# Altium PCB PSoC Devboard CAN Cape.PcbDoc
Units mil, origin at the board's own origin, x right, y up, seen from the top; angles counter-clockwise.
Board outline 1080 x 3125 mil, 2 copper layers (Top Layer, Bottom Layer); 15 components, 17 nets, 118 pads, 11 vias.
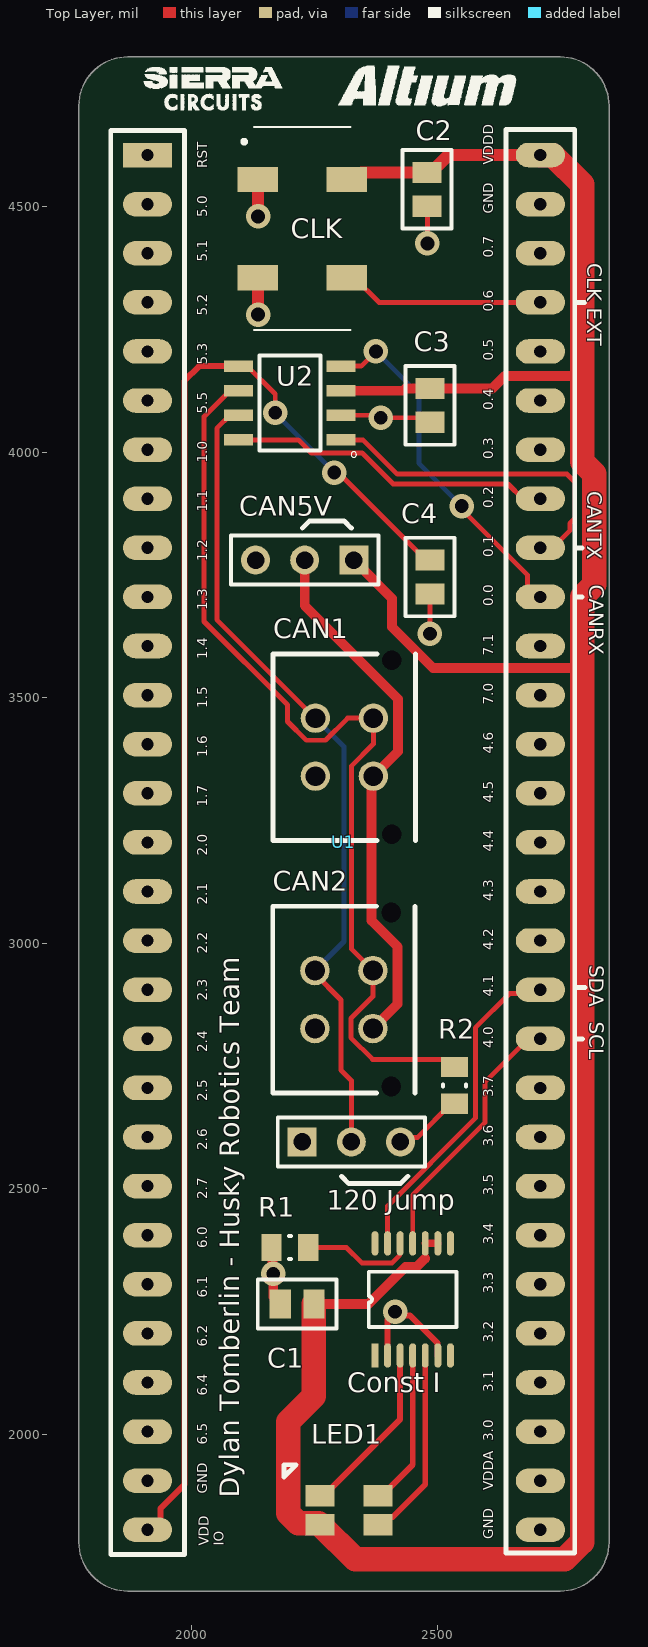
[diagram p0: Top Layer view]
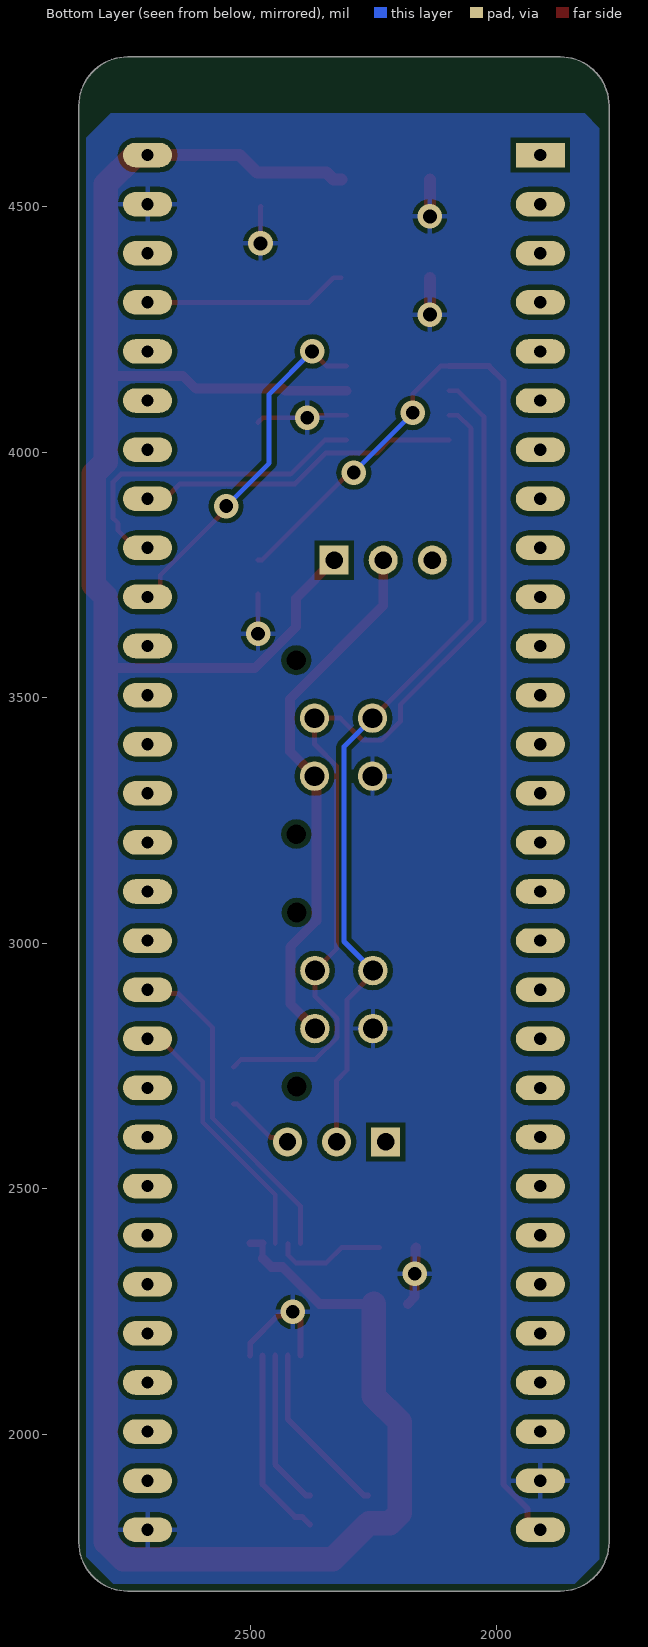
[diagram p1: Bottom Layer view, seen from below]

## Layer stack, top to bottom
Top Solder: solder mask 0.4, Solder Resist, Dk 3.5
Top Layer: signal copper 1.4
Dielectric 1: dielectric 12.6, FR-4, Dk 4.8
Bottom Layer: signal copper 1.4
Bottom Solder: solder mask 0.4, Solder Resist, Dk 3.5

## Board outline
1770,4705 cw(c1870,4705) 1870,4805 2750,4805 cw(c2750,4705) 2850,4705 2850,1780 cw(c2750,1780) 2750,1680 1870,1680 cw(c1870,1780) 1770,1780

## Design rules (kind name [scope] priority, off if disabled: settings)
Clearance [All] p1: gap=10 ignorepadtopadclearanceinfootprint=FALSE except(0: Arc-Hole Track-Hole SMDPad-Hole THPad-Hole Via-Hole Fill-Hole Poly-Hole Region-Hole Text-Hole)
PolygonConnect [All] p1: connectstyle=Relief reliefconductorwidth=10 reliefentries=4 polygonreliefangle="90 Angle" airgapwidth=10
RoutingVias [All] p1: holewidth=28 width=50 viastyle="Through Hole" minholewidth=28 minwidth=50 maxholewidth=28 maxwidth=50
SolderMaskExpansion [All] p1: expansion=4 istentingtop=FALSE
Width [All] p1: maxlimit=100 minlimit=8 preferedwidth=10 minimp=50.000000 maximp=50.000000 favimp=50.000000
30 further rules are at their usual default settings.

## Classes and differential pairs
component class U_RGB_LEDs: C1 "Const I" LED1 R1 u3
component class "PSoC Devboard CAN Cape": "120 Jump" C2 C3 C4 CAN1 CAN2 CAN5V CLK R2 U1 U2

## Components (designator, comment, footprint, x,y, rotation, side; value= is the part's Value field where it differs from the comment)
"120 Jump" "Header 3" HDR1X3 2225,2595 r0 top (schematic designator CAN_Jumper)
C1 "1uF" 0805 2214.45,2265 r180 top
C2 ".1uF" 0805 2479.29,4535 r90 top
C3 ".1uF" 0805 2485,4095 r270 top
C4 ".1uF" 0805 2485,3745.55 r270 top
CAN1 "Molex Micro" 0430450427 2310.94,3399.06 r90 top
CAN2 "Molex Micro" 0430450427 2310,2885 r90 top
CAN5V "Header 3" HDR1X3 2330,3780 r180 top
CLK "SG-636PCW_50.0000MC3__ROHS" SG-636 2225,4455 r270 top
"Const I" "ConstantCurrentDriver" NCP5623 2373.23,2160 r90 top (schematic designator CurrentDriver1)
LED1 "RGB_LED" ASMB-MTB1-0A3A2 2320,1845 r270 top
R1 "71R5K 1% 0805(2012)" RESC0805(2012)_N 2200,2380 r180 top value="120.00 Ohm"
R2 "120" RESC0805(2012)_N 2535,2710 r270 top value="120.00 Ohm"
U1 "Component_1" CY8CKIT-043 1910,4605 r0 top locked
U2 "MCP2562-E/SN" SOIC127P600X175-8N 2200,4100 r180 top

## Footprints (in the part's own frame and the unit in brackets; to place one, negate y for a bottom-side part, rotate by r counter-clockwise, add the part's x,y. Pads: shape width x height; smd on the part's side, far side on the other; paste and mask are expansions set on the pad)
0805 [mm]
  rect 1.1x1.5 smd: 1(-0.875,0) 2(0.875,0)
  silkscreen extent -2.03,-1.27 2.03,1.27
0430450427 [mil] "Molex micro-fit 3.0 4 pos"
  round 60 hole 40: 1(-59.06,59.06) 2(-59.06,-59.06) 3(59.06,59.06) 4(59.06,-59.06)
  round 0 hole 40 unplated: 7(177.17,-96.06) ""(-177.17,-96.06)
  silkscreen extent -190,-145 190,145
ASMB-MTB1-0A3A2 [mm]
  rect 1.1x1.5 / inner rect 0x0 / far side rect 0x0 all layers, no hole: 1(-0.75,-1.5)
  rect 1.1x1.5 / inner rect 1.1x1.5 / far side rect 0x0 all layers, no hole: 2(-0.75,1.5) 3(0.75,1.5) 4(0.75,-1.5)
  silkscreen extent -2.35,-3.37 -1.71,-2.73
CY8CKIT-043 [mil] "Breakout pins to make capes for this devboard"
  rect 100x50 hole 25: 1(0,0)
  oval 100x50 hole 25: 2(0,-100) 3(0,-200) 4(0,-300) 5(0,-400) 6(0,-500) 7(0,-600) 8(0,-700) 9(0,-800) 10(0,-900) 11(0,-1000) 12(0,-1100) 13(0,-1200) 14(0,-1300) 15(0,-1400) 16(0,-1500) 17(0,-1600) 18(0,-1700) 19(0,-1800) 20(0,-1900) 21(0,-2000) 22(0,-2100) 23(0,-2200) 24(0,-2300) 25(0,-2400) 26(0,-2500) 27(0,-2600) 28(0,-2700) 29(0,-2800) 30(800,-2800) 31(800,-2700) 32(800,-2600) 33(800,-2500) 34(800,-2400) 35(800,-2300) 36(800,-2200) 37(800,-2100) 38(800,-2000) 39(800,-1900) 40(800,-1800) 41(800,-1700) 42(800,-1600) 43(800,-1500) 44(800,-1400) 45(800,-1300) 46(800,-1200) 47(800,-1100) 48(800,-1000) 49(800,-900) 50(800,-800) 51(800,-700) 52(800,-600) 53(800,-500) 54(800,-400) 55(800,-300) 56(800,-200) 57(800,-100) 58(800,0)
  silkscreen extent -75,-2850 870,52
HDR1X3 [mm] "Connector; Header; 3 Position"
  rect 1.5x1.5 hole 0.9: 1(0,0)
  round 1.5 hole 0.9: 2(2.54,0) 3(5.08,0)
  silkscreen extent -1.27,-1.27 6.35,1.27
NCP5623 [mm] "Constant current driver for RGB LEDs (50mA)"
  rect 1.26x0.36 smd: 1(0,0)
  oval 1.26x0.36 smd: 2(0,-0.65) 3(0,-1.3) 4(0,-1.95) 5(0,-2.6) 6(0,-3.25) 7(0,-3.9) 8(5.8,-3.9) 9(5.8,-3.25) 10(5.8,-2.6) 11(5.8,-1.95) 12(5.8,-1.3) 13(5.8,-0.65) 14(5.8,0)
  silkscreen extent 1.46,-4.23 4.34,0.33
RESC0805(2012)_N [mm] "Chip Resistor, Body 2.0x1.3mm, IPC Medium Density"
  rect 1.05x1.4 smd: 1(-0.95,0) 2(0.95,0)
  silkscreen extent -0.05,-0.6 0.05,0.6, body extent -1.1,-0.67 1.1,0.68, height 0.7
SG-636 [mm]
  rect 1.3x2.1 smd: 1(-2.54,-2.3) 2(2.54,-2.3) 3(2.54,2.3) 4(-2.54,2.3)
  silkscreen extent -5.25,-3.1 5.25,2.5
SOIC127P600X175-8N [mm]
  rect 1.5x0.6 smd: 1(-2.65,1.905) 2(-2.65,0.635) 3(-2.65,-0.635) 4(-2.65,-1.905) 5(2.65,-1.905) 6(2.65,-0.635) 7(2.65,0.635) 8(2.65,1.905)
  silkscreen extent -3.44,-2.45 1.58,2.81

## Part data
"120 Jump" CAN5V: "Header, 3-Pin", LatestRevisionDate=17-Jul-2002, LatestRevisionNote="Re-released for DXP Platform.", Publisher="Altium Limited"
C1 C2 C3 C4: library part Cap
CAN1 CAN2: library part "Molex micro-fit 4-pin (dual row schematic)", "Molex micro-fit 3.0, P/N 0430450427"
CLK: library part SG-636, "Standard Clock Oscillators 50MHz 3.3Volt 100ppm -20C +70C", Arrow Part Number="SG-636PCW 50.0000MC3: ROHS", Manufacturer_Name="Epson Timing", Datasheet Link=http://www.mouser.com/ds/2/137/G-636PCE_en-1003252.pdf, Manufacturer_Part_Number="SG-636PCW 50.0000MC3: ROHS"
R1 R2: library part "120R 5% 0805", "120R 0.125W 5% 0805 (2012 Metric)  SMD", Case-EIA=0805, Case-Metric=2012, Power="0.125 W", Tolerance="5 %", Technology=SMT
U2: "Microchip MCP2562-E/SN, CAN Transceiver 1MBps 1-channel IEC 61000-4-2, 8-Pin SOIC", Package="SO-8 Microchip", Availability=Unavailable, MF=Microchip, MP=MCP2562-E/SN, Price=None, SnapEDA_Link=https://www.snapeda.com/parts/MCP2562-E/SN/Microchip/view-part/?ref=snap

## Via types
v1: diameter 50, hole 28, Top Layer to Bottom Layer, 11 vias

## Nets (pads, with @x,y where several pads share a name; then routed paths per layer and width w, separated by ;. In a path a pad name is that pad's centre, name@x,y a point inside that pad or via, vN(x,y) a via of type N, cw(c..) or ccw(c..) an arc to the next point about the centre after c; other vN are vias at no path point)
+5: "Const I.9" "Const I.10" C1.1 C2.2 C3.1 CAN5V.1 CLK.4 LED1.4 U1.58 U2.3 | length 5828
  Top Layer w10: 2450.55,4125 2455,4129.45
  Top Layer w12: 2475.59,2357.31 2475.59,2388.35
  Top Layer w15: 2475.59,2388.35 2501.18,2388.35
  Top Layer w20: C1.1 2360,2265 2435,2340 2457.68,2340 2474.98,2357.31 2475.59,2357.31 ; U2.3 2430.55,4125 ; CAN5V.1 2407.94,3702.06 2407.94,3643.42 2491.36,3560 2790,3560 2795,3565 ; 2435,4129.45 2455,4129.45 C3.1 2611.99,4129.45 2637.54,4155 2795,4155
  Top Layer w25: CLK.4 2331.3,4555 2345.75,4569.45 C2.2 2487.16,4569.45 2522.71,4605 U1.58
  Top Layer w50: C1.1 2248.9,2077.34 2196.42,2024.86 2196.42,1838.38 2216.92,1817.87 2258.54,1817.87 LED1.4 2262.13,1815.47 2332.6,1745 2759.85,1745 2795,1780.15 2795,3565 2795,3705 2820,3730 2820,3955.71 2795,3980.71 2795,4155 2795,4545 2735,4605 U1.58
GND: "Const I.2" "Const I.6" C1.2 C2.1 C3.2 C4.2 CAN1.1 CAN2.1 CLK.1 CLK.2 R1.2 U1.28 U1.30 U1.57 U2.2 | length 850
  Top Layer w10: CLK.2 CLK.2@2135,4354.45 ; CLK.1 CLK.1@2135,4554.45 ; U2.2 2380,4075 v1(2385,4070) 2475.55,4070 C3.2 ; C2.1 2480,4499.84 v1(2480,4425) ; v1(2485,3630) C4.2
  Top Layer w12: 2398.82,2160 2398.82,2233.68 v1(2414.11,2248.97) 2421.38,2241.7 2444.26,2241.7 2500.77,2185.19 2500.77,2160.42 2501.18,2160
  Top Layer w20: R1.2 2164.32,2378.28 2164.32,2328.41 v1(2166.04,2326.69) 2166.04,2278.96 C1.2
  Top Layer w25: v1(2135,4280) CLK.2@2135,4354.45 ; v1(2135,4480) CLK.1@2135,4554.45
NetCAN1_2: CAN1.2 CAN2.2 CAN5V.2 | length 1097.8
  Top Layer w20: CAN5V.2 2230,3687.22 2420,3497.22 2420,3390 CAN1.2 2366.06,3336.06 2366.06,3045.6 2419.06,2992.6 2419.06,2875.94 CAN2.2
NetCAN1_3: "120 Jump.2" CAN1.3 CAN2.3 U2.7 | length 1671.2
  Top Layer w10: U2.7 2077.95,4075 2051.14,4048.19 2051.14,3658.86 CAN1.3 ; CAN2.3 2250.94,2937.17 2304.06,2884.06 2304.06,2741.04 2325,2720.1 2325,2595
  Bottom Layer w10: CAN2.3 2310,3003.11 2310,3400 CAN1.3
NetCAN1_4: CAN1.4 CAN2.4 R2.1 U2.6 | length 1935.3
  Top Layer w10: U2.6 2077.95,4125 2025,4072.05 2025,3655 2195,3485 2195,3451.36 2233.25,3413.11 2272.36,3413.11 2317.36,3458.11 CAN1.4 2370,3405.47 2325,3360.47 2325,2988.11 CAN2.4 2369.06,2891.42 2324.06,2846.42 2324.06,2807.31 2368.29,2763.07 2519.33,2763.07 R2.1
NetCAN_Jumper_3: "120 Jump.3" R2.2 | length 142.1
  Top Layer w10: 2425,2595 2434.39,2604.39 2459.9,2604.39 2528.11,2672.6 R2.2
NetCLK_3: CLK.3 U1.55 | length 415.2
  Top Layer w10: CLK.3 2331.3,4355 2381.3,4305 U1.55
NetCurrentDriver1_3: "Const I.3" LED1.1 | length 357.8
  Top Layer w12: LED1.1 2268.82,1874.53 2424.41,2030.12 2424.41,2160
NetCurrentDriver1_4: "Const I.4" LED1.2 | length 319.5
  Top Layer w12: LED1.2 2386.93,1874.53 2450,1937.6 2450,2160
NetCurrentDriver1_5: "Const I.5" LED1.3 | length 393.2
  Top Layer w12: LED1.3 2394.71,1831.13 2409.46,1831.13 2475.59,1897.25 2475.59,2160
NetCurrentDriver1_12: "Const I.12" R1.1 | length 230.2
  Top Layer w10: R1.1 2314.79,2380 2346.25,2348.54 2407.97,2348.54 2423.61,2364.19 2423.61,2387.55 2424.41,2388.35
NetU1_49: U1.49 U2.4 | length 726.2
  Top Layer w10: U2.4 2345,4175 v1(2375,4205) ; v1(2550,3890) 2550,3883.43 2684.18,3749.26 2684.18,3723.48 2702.65,3705 U1.49
  Bottom Layer w10: v1(2375,4205) 2462.5,4117.5 2462.5,3977.5 v1(2550,3890)
NetU1_50: U1.50 U2.1 | length 689
  Top Layer w10: U2.1 2348.43,4025 2418.43,3955 2764.14,3955 2780,3939.14 2780,3865 2770,3855 2770,3840 2735,3805 U1.50
NetU1_51: U1.51 U2.8 | length 664
  Top Layer w10: U2.8 2216.73,4025 2243.54,3998.19 2346.96,3998.19 2410.15,3935 2644.18,3935 2674.18,3905 U1.51
SCL: "Const I.11" U1.40 | length 539
  Top Layer w10: 2450,2388.35 2450,2487.26 2597.56,2634.82 2597.56,2717.56 2685,2805 U1.40
SDA: "Const I.13" U1.41 | length 702.8
  Top Layer w10: 2398.82,2388.35 2398.82,2464.37 2577.56,2643.11 2577.56,2827.56 2647.35,2897.35 2702.35,2897.35 U1.41 U1.41@2685,2905
VDDIO: C4.1 U1.29 U2.5 | length 3086.4
  Top Layer w10: U2.5 2113.39,4175 2170,4118.39 v1(2170,4080) ; v1@2297.65,3950.54 v1(2290,3958.19) 2298.94,3958.19 2477.13,3780 C4.1
  Top Layer w12: U1.29 1918.43,1805 1935.98,1822.55 1935.98,1848 1985,1897.02 1985,4145 2015,4175 U2.5
  Bottom Layer w10: v1(2170,4080) 2170,4079.09 2290,3959.09 v1(2290,3958.19)
pads on no net: "120 Jump.1" "Const I.1" "Const I.7" "Const I.8" "Const I.14" CAN1. CAN1.7 CAN2. CAN2.7 CAN5V.3 U1.1 U1.2 U1.3 U1.4 U1.5 U1.6 U1.7 U1.8 U1.9 U1.10 U1.11 U1.12 U1.13 U1.14 U1.15 U1.16 U1.17 U1.18 U1.19 U1.20 U1.21 U1.22 U1.23 U1.24 U1.25 U1.26 U1.27 U1.31 U1.32 U1.33 U1.34 U1.35 U1.36 U1.37 U1.38 U1.39 U1.42 U1.43 U1.44 U1.45 U1.46 U1.47 U1.48 U1.52 U1.53 U1.54 U1.56

## Polygon pours and split planes (outlines as drawn)
no net on Top Layer "NONET_L01_P000" (solid, pour order 0): 1740,4825
GND on Bottom Layer "GND_L02_P002" (solid, pour order 2): 1820,4690 2785,4690 2835,4640 2835,1750 2780,1695 1840,1695 1790,1745 1790,4660

## Silkscreen, mask and mechanical layers (free items; w line width, h text height)
Top Overlay:
  drawing of 33 lines, arcs and shapes, not listed
  text "CLK EXT" at 2805,4385 h30 r270
  text "CANTX" at 2805,3920 h30 r270
  text "CANRX" at 2810,3730 h30 r270
  text "SDA" at 2810,2955 h30 r270
  text "SCL" at 2810,2840 h30 r270
  text "Dylan Tomberlin - Husky Robotics Team" at 2096.67,1870 h40 r90

## Text inside footprints (layer, text, board x,y; h text height)
U1: Top Overlay "GND" at 2613.76,1785.6 h20 r90; Top Overlay "VDDA" at 2613.76,1885.6 h20 r90; Top Overlay "3.0" at 2613.76,1985.6 h20 r90; Top Overlay "3.1" at 2613.76,2085.6 h20 r90; Top Overlay "3.2" at 2613.76,2185.6 h20 r90; Top Overlay "3.3" at 2613.76,2285.6 h20 r90; Top Overlay "3.4" at 2613.76,2385.6 h20 r90; Top Overlay "3.5" at 2613.76,2485.6 h20 r90; Top Overlay "3.6" at 2613.76,2585.6 h20 r90; Top Overlay "3.7" at 2613.76,2685.6 h20 r90; Top Overlay "4.0" at 2613.76,2785.6 h20 r90; Top Overlay "4.1" at 2613.76,2890.6 h20 r90; Top Overlay "4.2" at 2613.76,2985.6 h20 r90; Top Overlay "4.3" at 2613.76,3085.6 h20 r90; Top Overlay "4.4" at 2613.76,3185.6 h20 r90; Top Overlay "4.5" at 2613.76,3285.6 h20 r90; Top Overlay "4.6" at 2613.76,3385.6 h20 r90; Top Overlay "7.0" at 2613.76,3485.6 h20 r90; Top Overlay "7.1" at 2613.76,3585.6 h20 r90; Top Overlay "0.0" at 2613.76,3685.6 h20 r90; Top Overlay "0.1" at 2613.76,3785.6 h20 r90; Top Overlay "0.2" at 2613.76,3885.6 h20 r90; Top Overlay "0.3" at 2613.76,3985.6 h20 r90; Top Overlay "0.4" at 2613.76,4085.6 h20 r90; Top Overlay "0.5" at 2613.76,4185.6 h20 r90; Top Overlay "0.6" at 2613.76,4285.6 h20 r90; Top Overlay "0.7" at 2613.76,4395.6 h20 r90; Top Overlay "GND" at 2613.76,4485.6 h20 r90; Top Overlay "VDDD" at 2613.76,4585.6 h20 r90; Top Overlay "VDD / IO" at 2065,1772.01 h20 r90; Top Overlay "GND" at 2032,1878 h20 r90; Top Overlay "6.5" at 2032,1978 h20 r90; Top Overlay "6.4" at 2032,2078 h20 r90; Top Overlay "6.2" at 2032,2178 h20 r90; Top Overlay "6.1" at 2032,2278 h20 r90; Top Overlay "6.0" at 2032,2378 h20 r90; Top Overlay "2.7" at 2032,2478 h20 r90; Top Overlay "2.6" at 2032,2578 h20 r90; Top Overlay "2.5" at 2032,2678 h20 r90; Top Overlay "2.4" at 2032,2778 h20 r90; Top Overlay "2.3" at 2032,2883 h20 r90; Top Overlay "2.2" at 2032,2978 h20 r90; Top Overlay "2.1" at 2032,3078 h20 r90; Top Overlay "2.0" at 2032,3178 h20 r90; Top Overlay "1.7" at 2032,3278 h20 r90; Top Overlay "1.6" at 2032,3378 h20 r90; Top Overlay "1.5" at 2032,3478 h20 r90; Top Overlay "1.4" at 2032,3578 h20 r90; Top Overlay "1.3" at 2032,3678 h20 r90; Top Overlay "1.2" at 2032,3778 h20 r90; Top Overlay "1.1" at 2032,3878 h20 r90; Top Overlay "1.0" at 2032,3978 h20 r90; Top Overlay "5.5" at 2032,4078 h20 r90; Top Overlay "5.3" at 2032,4178 h20 r90; Top Overlay "5.2" at 2032,4278 h20 r90; Top Overlay "5.1" at 2032,4388 h20 r90; Top Overlay "5.0" at 2032,4478 h20 r90; Top Overlay "RST" at 2032,4578 h20 r90